# Altium PCB BSPD.PcbDoc
Units mil, origin at the board's own origin, x right, y up, seen from the top; angles counter-clockwise.
Board outline 2550 x 2415 mil, 2 copper layers (Top Layer, Bottom Layer); 48 components, 24 nets, 135 pads, 32 vias.
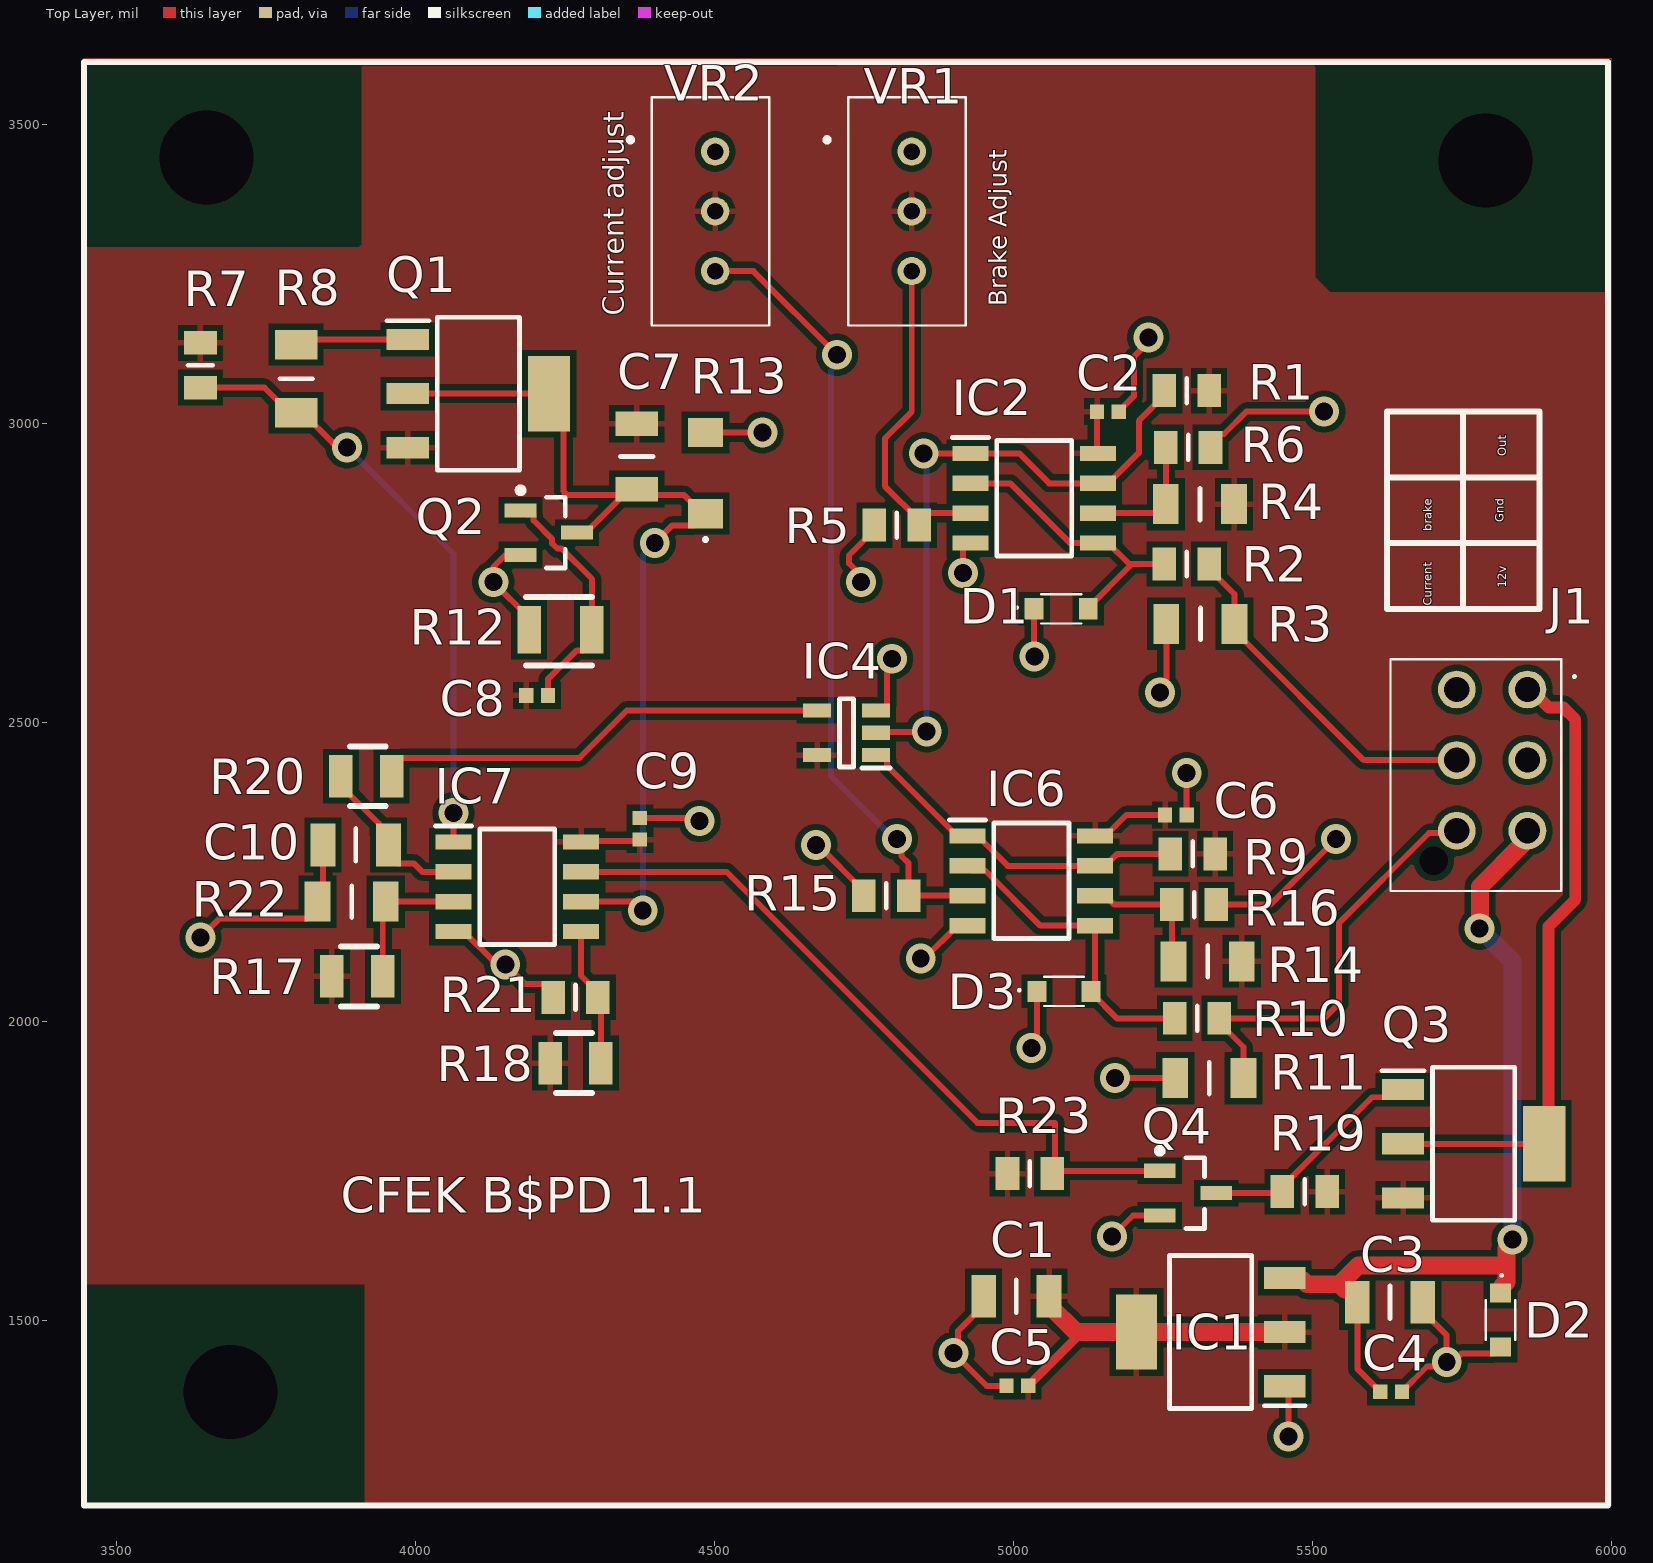
[diagram p0: Top Layer view]
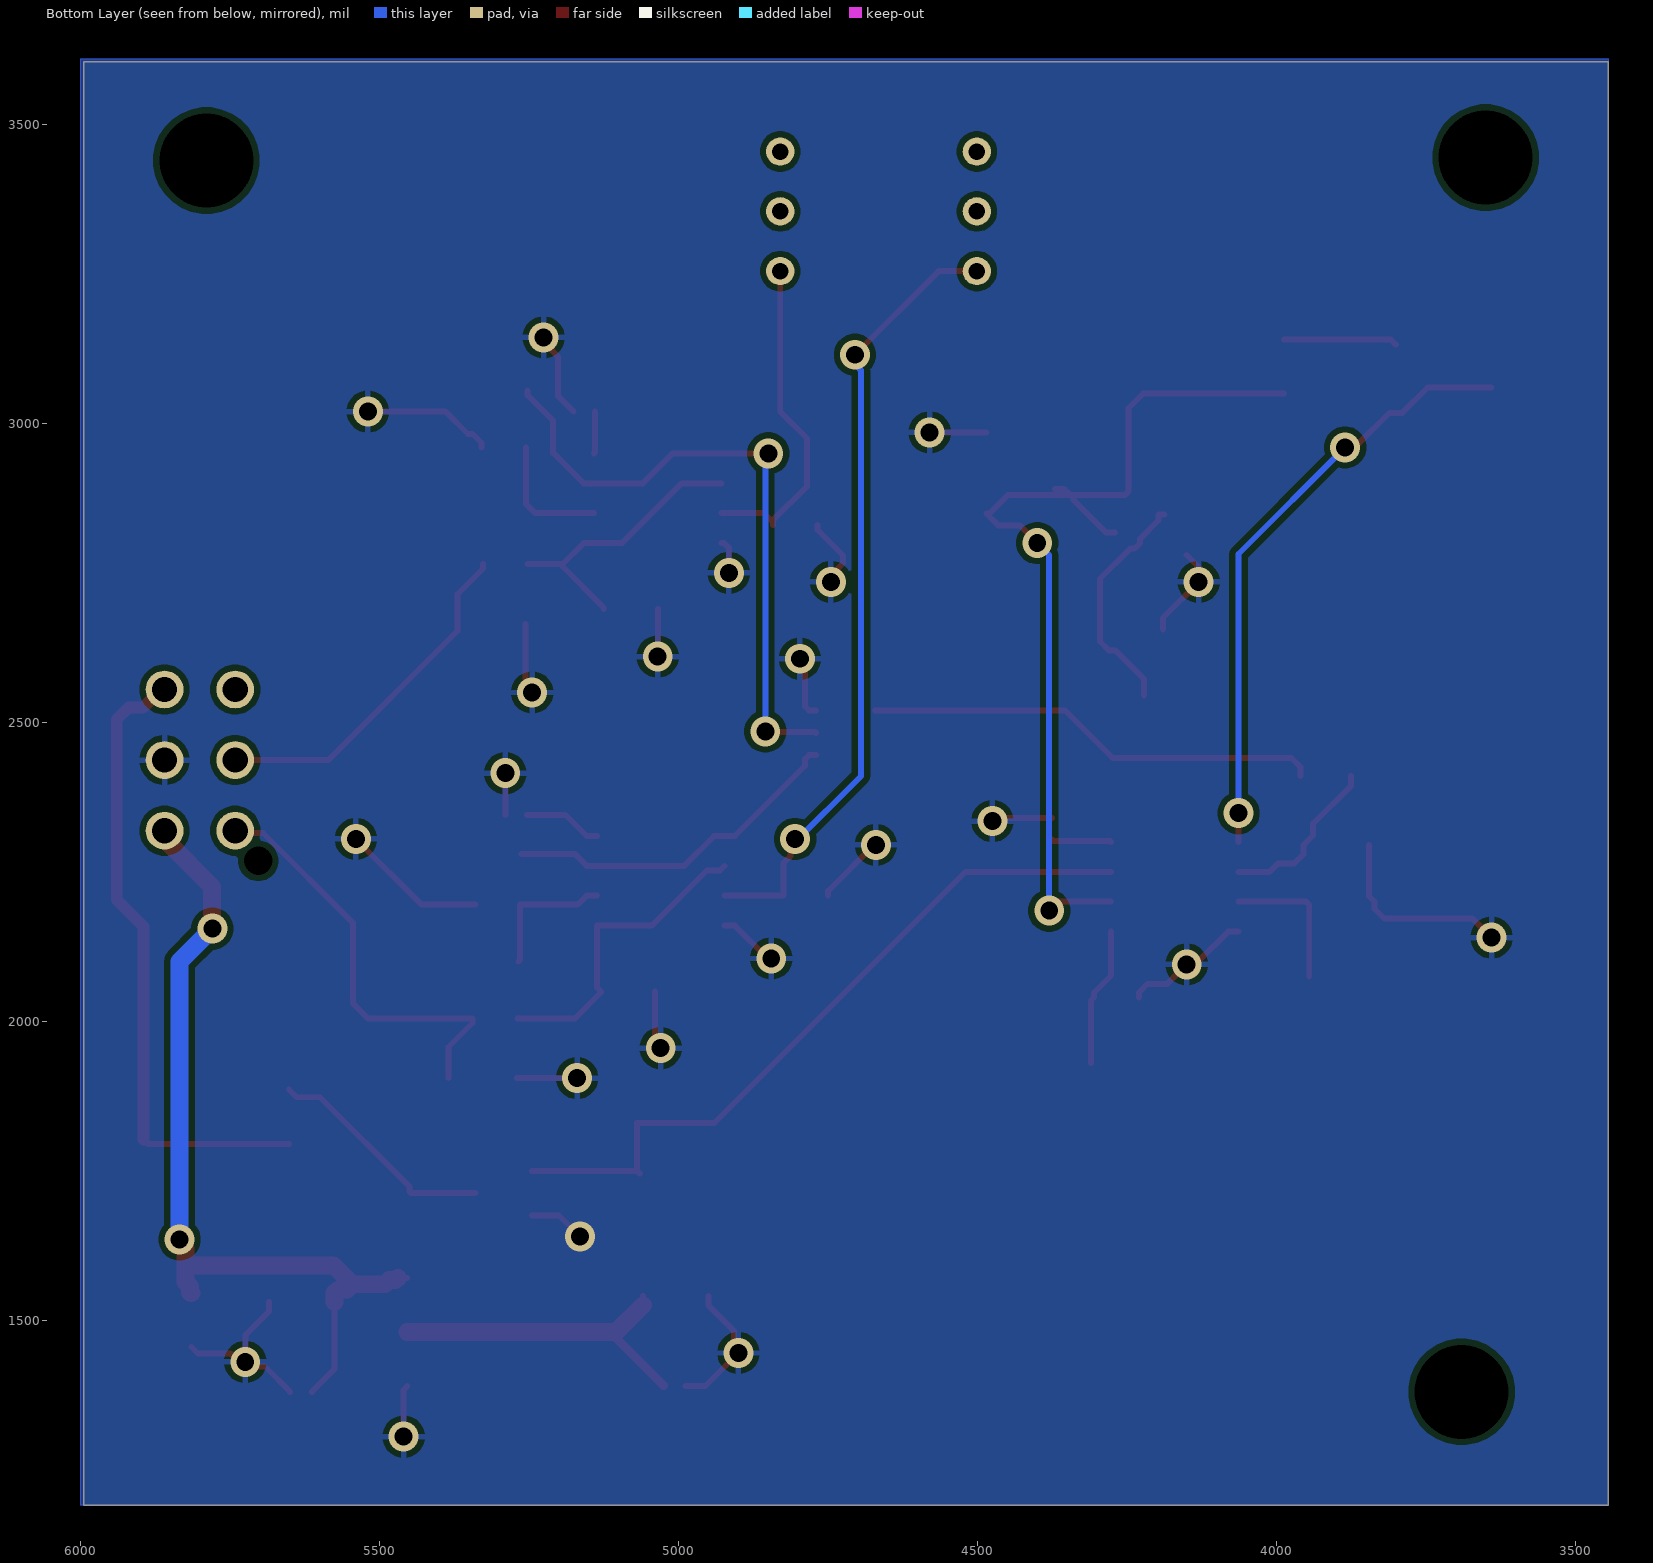
[diagram p1: Bottom Layer view, seen from below]
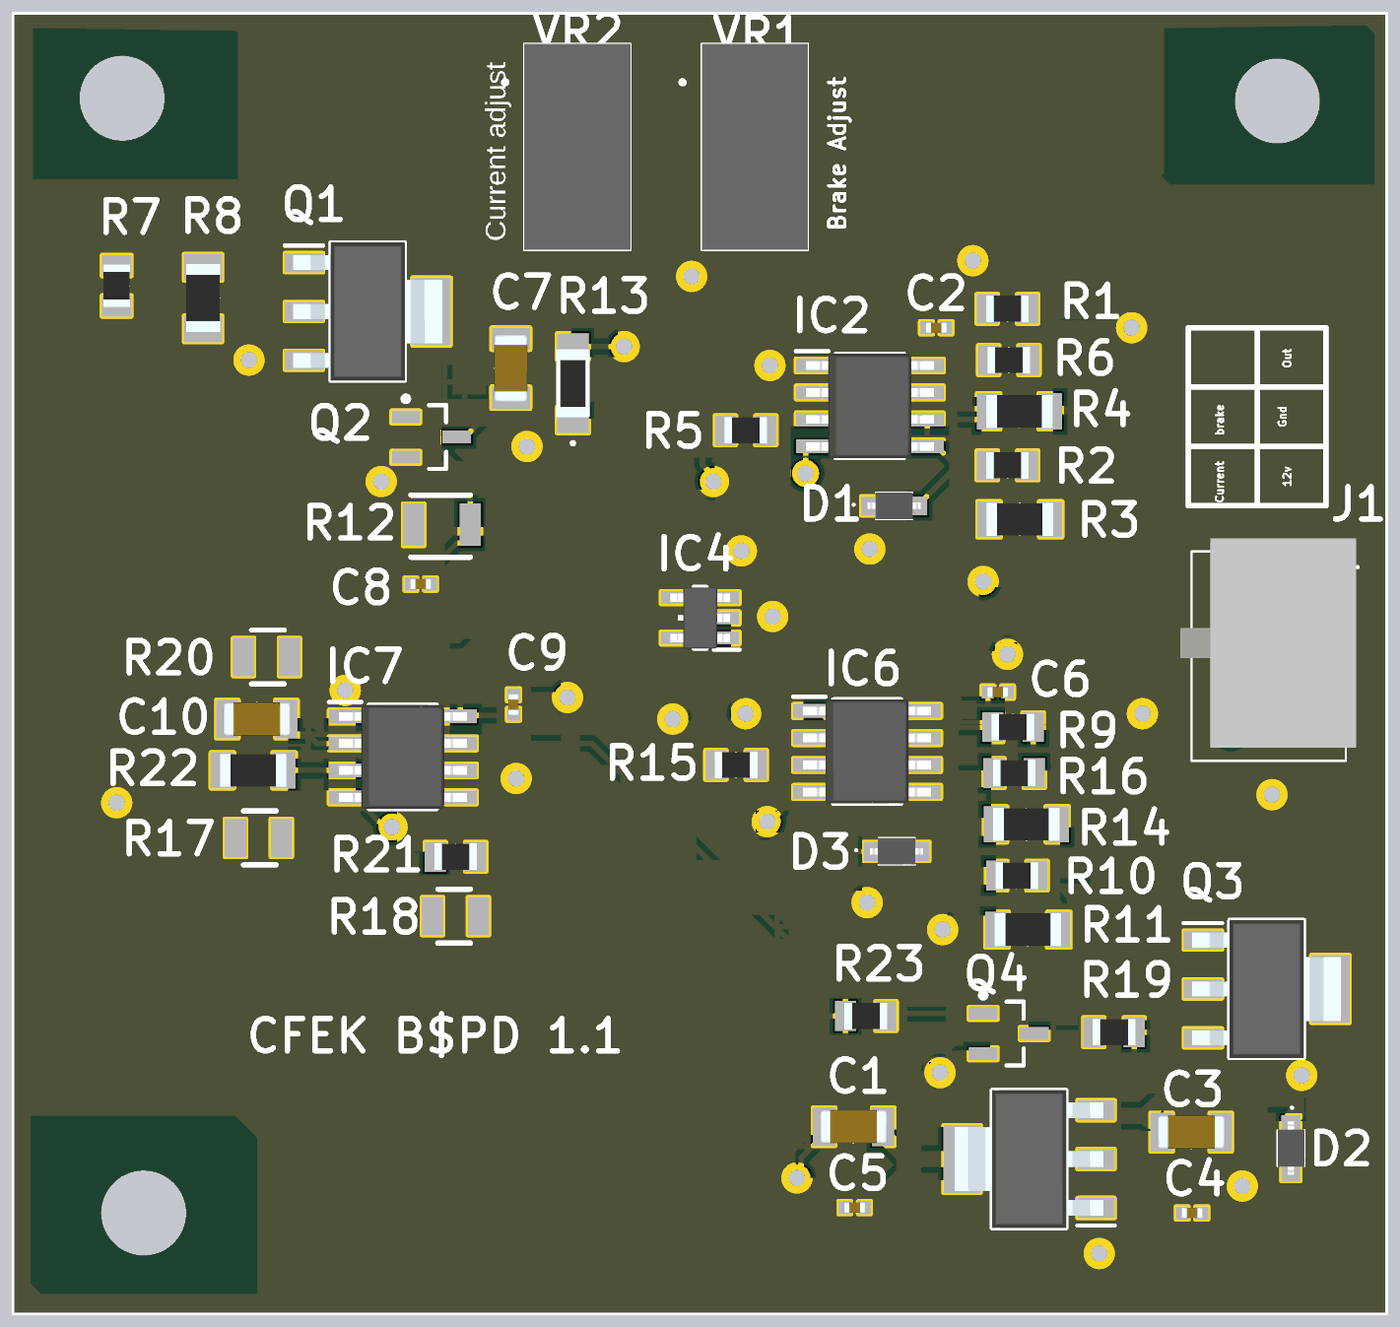
[diagram p2: 3D render of the assembled board from above, using the file's embedded part models]

## Layer stack, top to bottom
Top Solder: solder mask 0.4, Solder Resist, Dk 3.5
Top Layer: signal copper 1.4
Dielectric 1: dielectric 12.6, FR-4, Dk 4.8
Bottom Layer: signal copper 1.4
Bottom Solder: solder mask 0.4, Solder Resist, Dk 3.5

## Board outline
3445,1190 3445,3605 5995,3605 5995,1190

## Design rules (kind name [scope] priority, off if disabled: settings)
Clearance [All] p1: gap=10 ignorepadtopadclearanceinfootprint=FALSE except(0: Arc-Hole Track-Hole SMDPad-Hole THPad-Hole Via-Hole Fill-Hole Poly-Hole Region-Hole Text-Hole)
PolygonConnect [All] p1: connectstyle=Relief reliefconductorwidth=10 reliefentries=4 polygonreliefangle="90 Angle" airgapwidth=10
RoomDefinition bspd [InComponentClass('bspd')] p1: confinementstyle=ConfineIn formatcopy=TRUE lockcomponents=FALSE outline 6040,1255 7610,1255 7610,1645 6040,1645
RoutingVias [All] p1: holewidth=28 width=50 viastyle="Through Hole" minholewidth=28 minwidth=50 maxholewidth=28 maxwidth=50
SolderMaskExpansion [All] p1: expansion=4 istentingtop=FALSE
Width [All] p1: maxlimit=10 minlimit=5 preferedwidth=10 minimp=50.000000 maximp=50.000000 favimp=50.000000
30 further rules are at their usual default settings.

## Components (designator, comment, footprint, x,y, rotation, side; value= is the part's Value field where it differs from the comment)
C1 "CL31B106KAHNNNE" CAPC3216X180N 5005,1540 r180 top
C2 "GRM1555C1E103GE01D" CAPC1005X55N 5158.11,3020 r180 top
C3 "CL31B106KAHNNNE" CAPC3216X180N 5630.28,1530 r180 top
C4 "GRM1555C1E103GE01D" CAPC1005X55N 5631.89,1380 r180 top
C5 "GRM1555C1E103GE01D" CAPC1005X55N 5006.89,1390 r180 top
C6 "GRM1555C1E103GE01D" CAPC1005X55N 5271.89,2345 r180 top
C7 "CL31B106KAHNNNE" CAPC3216X180N 4370,2945 r90 top
C8 "GRM1555C1E103GE01D" CAPC1005X55N 4203.11,2545 r180 top
C9 "GRM1555C1E103GE01D" CAPC1005X55N 4375,2321.89 r90 top
C10 "CL31B106KAHNNNE" CAPC3216X180N 3899.72,2295 r0 top
D1 "DF2B36FU,H3F" 1SS357TPH3F 5080,2690 r270 top
D2 "DF2B36FU,H3F" 1SS357TPH3F 5815,1500.28 r180 top
D3 "DF2B36FU,H3F" 1SS357TPH3F 5084.72,2050 r270 top
IC1 "LM1117MPX-5.0_NOPB" SOT230P700X180-4N 5330,1480 r180 top
IC2 "LM393AD" SOIC127P600X175-8N 5035,2875 r0 top
IC4 "SN74AHC1G02DBVR" SOT95P280X145-5N 4720.79,2482.6 r180 top
IC6 "LM393AD" SOIC127P600X175-8N 5030,2235 r0 top
IC7 "LM393AD" SOIC127P600X175-8N 4170,2225 r0 top
J1 "206832-0601" 2068320601 5860,2555 r90 top
Q1 "DMP6023LE-13" SOT230P700X165-4N 4105,3050 r0 top
Q2 "2N7002" INF-PG-SOT23_M 4222.79,2817.4 r0 top
Q3 "DMP6023LE-13" SOT230P700X165-4N 5770,1795 r0 top
Q4 "2N7002" INF-PG-SOT23_M 5292.24,1712.45 r0 top
R1 "RNCP0805FTD10K0" RESC2012X65N 5290,3055 r0 top
R2 "RNCP0805FTD10K0" RESC2012X65N 5290,2765 r180 top
R3 "ERJ-8GEYJ104V" RESC3116X70N 5312.91,2665 r180 top
R4 "ERJ-8GEYJ104V" RESC3116X70N 5312.09,2865 r180 top
R5 "RNCP0805FTD10K0" RESC2012X65N 4805,2830 r180 top
R6 "RNCP0805FTD10K0" RESC2012X65N 5292.4,2960 r180 top
R7 "RNCP0805FTD10K0" RESC2012X65N 3640,3097.6 r90 top
R8 "RMCF1206FT100R" RESC3216X70N 3800,3075 r90 top
R9 "RNCP0805FTD10K0" RESC2012X65N 5300,2280 r0 top
R10 "RNCP0805FTD10K0" RESC2012X65N 5307.4,2005 r180 top
R11 "ERJ-8GEYJ104V" RESC3116X70N 5327.91,1905 r180 top
R12 "RMCF1206FT560K" RMCF1206FT560K 4210,2645 r180 top
R13 "ERA-8AEB105V" ERA8A_(0805) 4485,2917.09 r90 top
R14 "ERJ-8GEYJ104V" RESC3116X70N 5325,2100 r180 top
R15 "RNCP0805FTD10K0" RESC2012X65N 4787.4,2210 r180 top
R16 "RNCP0805FTD10K0" RESC2012X65N 5302.4,2195 r180 top
R17 "ERJ-8GEYJ393V" ERJ-8GEYJ393V 3830,1990 r0 top
R18 "ERJ-8GEYJ393V" ERJ-8GEYJ393V 4340,2015 r180 top
R19 "RNCP0805FTD10K0" RESC2012X65N 5487.4,1715 r0 top
R20 "ERJ-8GEYJ393V" ERJ-8GEYJ393V 3845,2325 r0 top
R21 "RNCP0805FTD10K0" RESC2012X65N 4267.6,2040 r0 top
R22 "ERJ-8GEYJ104V" RESC3116X70N 3892.91,2200 r180 top
R23 "RNCP0805FTD10K0" RESC2012X65N 5027.6,1745 r0 top
VR1 "M64X203KB40" M64X203KB40 4830,3455 r0 top
VR2 "M64X203KB40" M64X203KB40 4501.09,3455 r0 top

## Footprints (in the part's own frame and the unit in brackets; to place one, negate y for a bottom-side part, rotate by r counter-clockwise, add the part's x,y. Pads: shape width x height; smd on the part's side, far side on the other; paste and mask are expansions set on the pad)
1SS357TPH3F [mm]
  rect 0.9x0.8 smd: 1(0,-1.15) 2(0,1.15)
  silkscreen extent -0.63,-1.95 0.63,0.85, body extent -0.63,-1.25 0.63,1.25, height 0.9
2068320601 [mm]
  round 1.605 hole 1.07: 1(0,0) 2(-3,0) 3(-6,0) 4(0,3) 5(-3,3) 6(-6,3)
  round 0.6 hole 1.2 unplated: MH1(-7.28,3.98)
  silkscreen extent -8.56,-2.05 1.29,5.82, body extent -7.95,-1.92 1.9,6.34, height 9.8
CAPC1005X55N [mm]
  rect 0.6x0.62 smd: 1(-0.46,0) 2(0.46,0)
  body extent -0.5,-0.25 0.5,0.25, height 0.55
CAPC3216X180N [mm]
  rect 1.05x1.82 smd: 1(-1.39,0) 2(1.39,0)
  silkscreen extent 0,-0.7 0,0.7, body extent -1.6,-0.8 1.6,0.8, height 1.8
ERA8A_(0805) [mm]
  rect 1.25x1.5 smd: 1(-1.725,0) 2(1.725,0)
  silkscreen extent -2.87,-0.05 -2.78,0.05, body extent -1.6,-0.8 1.6,0.8, height 0.6
ERJ-8GEYJ393V [mil] "39k 1/4w smd resistor"
  rect 39.37x70.87 smd: 1(30,85) 2(115,85)
  silkscreen extent 45,35 105,135
INF-PG-SOT23_M [mm] "SOT23, 3-Leads, Body 2.9x1.3mm, Pitch 0.95mm, IPC Low Density"
  rect 1.35x0.6 smd: 1(-1.2,0.95) 2(-1.2,-0.95) 3(1.2,0)
  silkscreen extent -1.32,-1.5 0.7,1.92, body extent -0.7,-1.5 0.7,1.5, height 1.1
M64X203KB40 [mm]
  round 1.2 hole 0.7: A1(0,0) B1(0,-2.54) C1(0,-5.08)
  silkscreen extent -3.7,-7.39 2.3,2.31, body extent -2.7,-7.39 2.3,2.31, height 9.9
RESC2012X65N [mm]
  rect 1x1.4 smd: 1(-0.95,0) 2(0.95,0)
  silkscreen extent 0,-0.53 0,0.53, body extent -1,-0.63 1,0.63, height 0.65
RESC3116X70N [mm]
  rect 1.1x1.7 smd: 1(-1.45,0) 2(1.45,0)
  silkscreen extent 0,-0.67 0,0.67, body extent -1.56,-0.77 1.56,0.77, height 0.7
RESC3216X70N [mm]
  rect 1.25x1.8 smd: 1(-1.45,0) 2(1.45,0)
  silkscreen extent 0,-0.7 0,0.7, body extent -1.6,-0.8 1.6,0.8, height 0.7
RMCF1206FT560K [mil]
  rect 39.37x78.74 smd: 1(-85,-10) 2(20,-10)
  silkscreen extent -85,-65 25,50
SOIC127P600X175-8N [mm]
  rect 1.528x0.65 smd: 1(-2.711,1.905) 2(-2.711,0.635) 3(-2.711,-0.635) 4(-2.711,-1.905) 5(2.711,-1.905) 6(2.711,-0.635) 7(2.711,0.635) 8(2.711,1.905)
  silkscreen extent -3.47,-2.45 1.6,2.58, body extent -3.01,-2.45 3.01,2.45, height 1.63
SOT95P280X145-5N [mm]
  rect 1.2x0.6 smd: 1(-1.25,0.95) 2(-1.25,0) 3(-1.25,-0.95) 4(1.25,-0.95) 5(1.25,0.95)
  silkscreen extent -1.85,-1.45 0.3,1.5, body extent -1.4,-1.45 1.4,1.45, height 1.2
SOT230P700X165-4N [mm]
  rect 1.8x0.9 smd: 1(-3,2.3) 2(-3,0) 3(-3,-2.3)
  rect 1.8x3.2 smd: 4(3,0)
  silkscreen extent -3.9,-3.25 1.75,3.25, body extent -3.5,-3.25 3.5,3.25, height 1.65
SOT230P700X180-4N [mm]
  rect 1.75x0.95 smd: 1(-3.15,2.3) 2(-3.15,0) 3(-3.15,-2.3)
  rect 1.75x3.2 smd: 4(3.15,0)
  silkscreen extent -4.03,-3.25 1.75,3.25, body extent -3.5,-3.25 3.5,3.25, height 1.8

## Part data
C1 C3 C7 C10: "Capacitor", Manufacturer_Name="Samsung Electro-Mechanics", Mouser Part Number=187-CL31B106KAHNNNE, Arrow Part Number=CL31B106KAHNNNE, Arrow Price/Stock=https://www.arrow.com/en/products/cl31b106kahnnne/samsung-electro-mechanics?region=europe, Datasheet Link=https://datasheet.datasheetarchive.com/originals/distributors/Datasheets_SAMA/d94547340e0e9d2be5f415b64e4e2f0a.pdf, Height=1.8mm, Manufacturer_Part_Number=CL31B106KAHNNNE, Mouser Price/Stock=https://www.mouser.co.uk/ProductDetail/Samsung-Electro-Mechanics/CL31B106KAHNNNE?qs=349EhDEZ59r5EZhnLOTsYA%3D%3D
C2 C4 C5 C6 C8 C9: "Capacitor", Manufacturer_Name="Murata Electronics", Mouser Part Number=81-GRM1555C1E103GE1D, Datasheet Link=http://www.murata.com/~/media/webrenewal/support/library/catalog/products/capacitor/mlcc/c02e.pdf, Height=0.55mm, Manufacturer_Part_Number=GRM1555C1E103GE01D, Mouser Price/Stock=https://www.mouser.co.uk/ProductDetail/Murata-Electronics/GRM1555C1E103GE01D?qs=d0WKAl%252BL4KYoPP5%252BcWf4LA%3D%3D
D1 D2 D3: "TVS Diode (Bi-directional)", Manufacturer_Name=Toshiba, Mouser Part Number=757-DF2B36FUH3F, Arrow Part Number=DF2B36FU,H3F, Arrow Price/Stock=https://www.arrow.com/en/products/df2b36fuh3f/toshiba?region=nac, Datasheet Link=http://toshiba.semicon-storage.com/info/docget.jsp?did=36248&prodName=DF2B36FU, Height=1mm, Manufacturer_Part_Number=DF2B36FU,H3F, Mouser Price/Stock=https://www.mouser.co.uk/ProductDetail/Toshiba/DF2B36FUH3F?qs=PDgMCp4xDJY7HvoH3U6rfA%3D%3D
IC1: "Integrated Circuit", Arrow Part Number=LM1117MPX-5.0/NOPB, Manufacturer_Name="Texas Instruments", Mouser Part Number=926-LM1117MPX5.0NOPB, Arrow Price/Stock=https://www.arrow.com/en/products/lm1117mpx-5.0nopb/texas-instruments?region=nac, Datasheet Link=http://www.ti.com/lit/gpn/lm1117, Height=1.8mm, Manufacturer_Part_Number=LM1117MPX-5.0/NOPB, Mouser Price/Stock=https://www.mouser.co.uk/ProductDetail/Texas-Instruments/LM1117MPX-5.0-NOPB?qs=X1J7HmVL2ZE1O12Qsl7F9g%3D%3D
IC2 IC6 IC7: "Integrated Circuit", Manufacturer_Name="Texas Instruments", Mouser Part Number=595-LM393AD, Arrow Part Number=LM393AD, Arrow Price/Stock=https://www.arrow.com/en/products/lm393ad/texas-instruments?region=nac, Datasheet Link=http://www.ti.com/lit/ds/symlink/lm393a.pdf, Height=1.75mm, Manufacturer_Part_Number=LM393AD, Mouser Price/Stock=https://www.mouser.co.uk/ProductDetail/Texas-Instruments/LM393AD?qs=LfG3tU9ud8Dw2sg2xFhQ4Q%3D%3D
IC4: "Integrated Circuit", Manufacturer_Name="Texas Instruments", Mouser Part Number=595-SN74AHC1G02DBVR, Arrow Part Number=SN74AHC1G02DBVR, Arrow Price/Stock=https://www.arrow.com/en/products/sn74ahc1g02dbvr/texas-instruments, Datasheet Link=http://www.ti.com/lit/gpn/sn74ahc1g02, Height=1.45mm, Manufacturer_Part_Number=SN74AHC1G02DBVR, Mouser Price/Stock=https://www.mouser.co.uk/ProductDetail/Texas-Instruments/SN74AHC1G02DBVR?qs=VuX40u8tcuDWJaATLLYZCQ%3D%3D
J1: "Connector", Manufacturer_Name=Molex, Mouser Part Number=538-206832-0601, Datasheet Link=https://componentsearchengine.com/Datasheets/1/206832-0601.pdf, Height=10.99mm, Manufacturer_Part_Number=206832-0601, Mouser Price/Stock=https://www.mouser.co.uk/ProductDetail/Molex/206832-0601?qs=EBDBlbfErPyv6tUvq0oX3w%3D%3D
Q1 Q3: "MOSFET (P-Channel)", Manufacturer_Name="Diodes Inc.", Mouser Part Number=621-DMP6023LE-13, Arrow Part Number=DMP6023LE-13, Arrow Price/Stock=https://www.arrow.com/en/products/dmp6023le-13/diodes-incorporated?region=nac, Datasheet Link=https://www.diodes.com/assets/Datasheets/DMP6023LE.pdf, Height=1.65mm, Manufacturer_Part_Number=DMP6023LE-13, Mouser Price/Stock=https://www.mouser.co.uk/ProductDetail/Diodes-Incorporated/DMP6023LE-13?qs=jXf%2FRVhl83aBpRq%2FTUDEyw%3D%3D
Q2 Q4: library part CMP-1149-00026-1, "N-Channel OptiMOS Small-Signal-Transistor, 60 V VDS, 0.3 A ID, -55 to 150 degC, PG-SOT23, Reel, Green", Manufacturer=Infineon, ComponentLink1Description="Manufacturer URL", ComponentLink1URL=http://www.infineon.com/, ComponentLink2Description=Datasheet, ComponentLink2URL=http://www.infineon.com/dgdl/2N7002_Rev2.4.pdf?folderId=db3a3043156fd573011622e10b5c1f67&fileId=db3a304319bc939a0119c2a9461e79e6, ComponentLink3Description="Package Specification", ComponentLink3URL=http://www.infineon.com/dgdl/SOT23-Package_Overview.pdf?folderId=db3a30431936bc4b0119532290053c66&fileId=db3a30431936bc4b0119533468123c85, DatasheetVersion="Rev. 2.4", Green=TRUE, Halogen-free=TRUE, ID (max)="0.3Â A", IDpuls (max)="1.2Â A", Mounting Technology="Surface Mount", PackageDescription="3-Pin Small Outline Transistor Package, 2.9 x 1.3 mm Body, 0.95 mm Pitch", PackageReference=PG-SOT23, PackageVersion=Apr-08, Packing=Reel, PartNumber=2N7002, Ptot (max)="0.5Â W", QG="0.4Â nC", RDS (on) (max)="3,000 mOhm", RDS (on) (max) (@4.5V)="4,000 mOhm", RthJA (max)="250 K/W", VDS (max)="60 V", VGS(th) (max)="2.5Â V", VGS(th) (min)="1.5Â V"
R1 R2 R5 R6 R7 R8 R9 R10 R15 R16 R19 R21 R23: "Resistor", Manufacturer_Name="Stackpole Electronics"
  R1 R2 R5 R6 R7 R9 R10 R15 R16 R19 R21 R23: Arrow Part Number=RNCP0805FTD10K0, Arrow Price/Stock=https://www.arrow.com/en/products/rncp0805ftd10k0/stackpole-electronics?region=nac, Datasheet Link=https://cs.seielect.com/catalog/SEI-RNCP.pdf, Height=0.65mm, Manufacturer_Part_Number=RNCP0805FTD10K0
  R8: Arrow Part Number=RMCF1206FT100R, Arrow Price/Stock=https://www.arrow.com/en/products/rmcf1206ft100r/stackpole-electronics, Datasheet Link=https://cs.seielect.com/catalog/SEI-RMCF_RMCP.pdf, Height=0.7mm, Manufacturer_Part_Number=RMCF1206FT100R
R3 R4 R11 R14 R22: "Resistor", Manufacturer_Name=Panasonic, Mouser Part Number=667-ERJ-8GEYJ104V, Arrow Part Number=ERJ-8GEYJ104V, Arrow Price/Stock=https://www.arrow.com/en/products/erj-8geyj104v/panasonic?region=nac, Datasheet Link=http://industrial.panasonic.com/www-cgi/jvcr13pz.cgi?E+PZ+3+AOA0001+ERJ8GEYJ104V+7+WW, Height=0.7mm, Manufacturer_Part_Number=ERJ-8GEYJ104V, Mouser Price/Stock=https://www.mouser.co.uk/ProductDetail/Panasonic/ERJ-8GEYJ104V?qs=1VWA5LkbEaq%252BpFGvVNqM0w%3D%3D
R12: "560k smd 1/4 w resistor"
R13: "Resistor", Manufacturer_Name=Panasonic, Mouser Part Number=667-ERA-8AEB105V, Datasheet Link=http://industrial.panasonic.com/cdbs/www-data/pdf/RDM0000/AOA0000C307.pdf, Height=0.7mm, Manufacturer_Part_Number=ERA-8AEB105V, Mouser Price/Stock=https://www.mouser.com/Search/Refine.aspx?Keyword=667-ERA-8AEB105V
VR1 VR2: "Variable Resistor", Manufacturer_Name=Vishay, Mouser Part Number=594-64X203, Arrow Part Number=M64X203KB40, Arrow Price/Stock=https://www.arrow.com/en/products/m64x203kb40/vishay, Datasheet Link=https://componentsearchengine.com/Datasheets/1/M64X203KB40.pdf, Height=9.8mm, Manufacturer_Part_Number=M64X203KB40, Mouser Price/Stock=https://www.mouser.co.uk/ProductDetail/Vishay-Spectrol/M64X203KB40?qs=iBCKGqwqm%252Bj9keWMEvhABw%3D%3D

## Free pads (board coordinates)
  round 80 hole 157.48 unplated: 2(3650,3445) 2(3690,1380) 2(5790,3440)

## Via types
v1: diameter 50, hole 30, Top Layer to Bottom Layer, 32 vias

## Nets (pads, with @x,y where several pads share a name; then routed paths per layer and width w, separated by ;. In a path a pad name is that pad's centre, name@x,y a point inside that pad or via, vN(x,y) a via of type N, cw(c..) or ccw(c..) an arc to the next point about the centre after c; other vN are vias at no path point)
1out: IC7.1 R7.1 R8.1 | length 1020.3
  Top Layer w10: R7.1 3746.89,3060.2 3789.17,3017.91 R8.1 3810.83,3017.91 3861.09,2967.65 3877.35,2967.65 v1(3885,2960) ; IC7.1 v1(4063.27,2348.27)
  Bottom Layer w10: v1(3885,2960) 4063.27,2781.73 v1(4063.27,2348.27)
2in-: C7.1 IC7.6 Q1.2 Q1.4 Q2.3 R13.1 | length 1632.9
  Top Layer w10: Q1.2 Q1.4 4247.24,3025.87 4247.24,2886.41 4253.09,2880.55 C7.1@4345.12,2880.55 ; Q2.3 4284.79,2817.4 4339.17,2871.78 4339.17,2874.61 C7.1@4345.12,2880.55 ; IC7.6 4365,2200 v1(4380,2185) ; C7.1 4354.84,2890.28 C7.1@4345.12,2880.55 ; v1(4400,2800) 4429.57,2829.57 4465.39,2829.57 R13.1 4480.08,2849.17 4448.7,2880.55 C7.1@4345.12,2880.55
  Bottom Layer w10: v1(4380,2185) 4380,2780 v1(4400,2800)
+5: C1.1 C2.2 C5.1 C6.2 C7.2 C8.2 C9.1 IC1.2 IC1.4 IC2.8 IC4.5 IC6.8 IC7.8 Q1.3 Q3.3 R1.2 R4.1 R7.2 R9.2 R14.1 R17.1 R18.2 R19.2 R23.1 VR1.B1 VR2.B1 | length 853.1
  Top Layer w10: IC7.8 4278.62,2301.89 4373.11,2301.89 C9.1 ; C5.1 C5.1@5025,1390.39 ; C1.1@5059.72,1524.84 C1.1 ; 5104.57,1469.96 5104.57,1480 ; IC6.8 5154.02,2310 5189.02,2345 C6.2 ; C2.2 5140,2951.73 IC2.8
  Top Layer w15: C5.1@5025,1390.39 5104.57,1469.96
  Top Layer w30: C1.1@5059.72,1524.84 5104.57,1480 IC1.4 IC1.2
+12: C3.2 C4.2 D2.1 IC1.3 J1.3 | length 1447.4
  Top Layer w10: IC1.3 IC1.3@5469.76,1570.55 ; C3.2 5575.55,1418.62 5613.78,1380.39 C4.2 ; J1.3@5860,2304.39 J1.3
  Top Layer w30: IC1.3@5469.76,1570.55 5473.46,1566.85 5484.19,1566.85 5491.04,1560 5545.55,1560 ; C3.2 5575.55,1545.16 5569.88,1550.83 5554.72,1550.83 5545.55,1560 ; v1(5780,2155) 5780.61,2155.61 5780.61,2225 5853.65,2298.04 5853.65,2303.45 5854.59,2304.39 J1.3@5860,2304.39 ; D2.1 5816.97,1545.55 5817.72,1546.3 5817.72,1556.59 5825,1563.87 5825,1591.73 ; v1(5835,1635) 5835,1629.59 5825,1619.59 5825,1591.73 ; 5545.55,1560 5577.28,1591.73 5825,1591.73
  Bottom Layer w30: v1(5780,2155) 5835,2100 v1(5835,1635)
Brake_Transducer: J1.5 R2.1 R3.1 | length 590.9
  Top Layer w10: R2.1 5327.4,2757.13 5370,2714.53 R3.1 5370,2653.19 5586.3,2436.89 J1.5
BSPD_Out: J1.1 Q3.2 Q3.4 | length 1068.4
  Top Layer w10: Q3.2 Q3.4 Q3.4@5895,1801.89 ; J1.1 J1.1@5865.72,2555
  Top Layer w20: J1.1@5865.72,2555 5895.81,2524.91 5920.09,2524.91 5940,2505 5940,2203.43 5895,2158.43 5895,1885.87 Q3.4@5895,1801.89
comparitor1: IC4.1 IC6.1 IC6.7 R9.1 | length 584.1
  Top Layer w10: IC4.1 4781.81,2445.2 4788.62,2438.39 4788.62,2427.36 4905.98,2310 IC6.1 4940.55,2310 4990.55,2260 IC6.7 5154.02,2260 5174.02,2280 R9.1
comparitor2: IC2.1 IC2.7 IC4.2 R1.1 | length 1086.6
  Top Layer w10: IC4.2 4771.2,2483.8 4853.8,2483.8 v1(4855,2485) ; v1(4850,2950) IC2.1 5010,2950 5060,2900 IC2.7 5159.02,2900 5210,2950.98 5210,3004.53 5252.6,3047.13 R1.1
  Bottom Layer w10: v1(4850,2950) 4855,2945 v1(4855,2485) v1@4855,2475
Currentsensorin: J1.6 R10.1 R11.1 | length 722.6
  Top Layer w10: R11.1 5385,1956.93 5344.8,1997.13 R10.1 5520,2005 5545,2030 5545,2164.7 5695.3,2314.99 5738.1,2314.99 J1.6
GND: C1.2 C2.1 C3.1 C4.1 C5.2 C6.1 C9.2 C10.1 D1.1 D2.2 D3.1 IC1.1 IC2.4 IC4.3 IC6.4 IC7.4 J1.2 Q2.2 Q4.2 R3.2 R5.2 R6.1 R11.2 R12.2 R13.2 R15.2 R16.1 R21.1 R22.2 | length 3187.5
  Top Layer w10: v1(3640,2140) 3671.54,2171.54 3819.17,2171.54 3835.83,2188.19 R22.2 3845,2209.17 C10.1 ; IC7.4 4080.55,2150 4127.9,2102.65 4142.35,2102.65 v1(4150,2095) 4182.44,2062.56 4215.51,2062.56 4230.2,2047.87 R21.1 ; Q2.2@4150,2780 4130,2760 v1(4130,2735) 4130,2734.68 4190,2674.68 R12.2 ; C9.2 4470,2340 v1(4475,2335) ; R13.2 v1(4580,2985) ; v1(4670,2295) 4672.87,2295 4750,2217.87 R15.2 ; v1(4745.29,2735) 4745.29,2745.82 4725,2766.12 4725,2779.53 4767.6,2822.13 R5.2 ; IC4.3 4781.81,2520 4788.62,2526.81 4788.62,2587.3 4796.99,2595.67 v1(4796.99,2606.49) ; v1(4845,2105) 4850.98,2105 4905.98,2160 IC6.4 ; v1(4915.98,2750) 4915.98,2792.2 4923.78,2800 IC2.4 ; C1.2 4950.28,1524.84 4907.65,1482.22 4907.65,1452.65 v1(4900,1445) 4955,1390 C5.2 ; v1(5030,1955) 5039.45,1964.45 D3.1 ; D1.1 5034.72,2610.28 v1(5035,2610) ; v1(5165,1640) 5200.05,1675.05 Q4.2 ; v1(5170,1905) R11.2 ; C2.1 5176.22,3020.39 5201.52,3045.69 5201.52,3111.52 v1@5220,3130 ; v1(5245,2550) 5255.83,2560.83 R3.2 ; C6.1 v1(5290,2415) ; R6.1 5329.8,2967.87 5344.49,2982.56 5352.36,2982.56 5389.8,3020 v1(5520,3020) ; R16.1 5430,2195 v1(5540,2305) ; IC1.1 5460,1383.46 v1(5460,1305) ; C4.1 5650,1380.39 5691.95,1422.35 5717.35,1422.35 v1(5725,1430) ; C3.1 5685,1514.84 5725,1474.84 v1(5725,1430) ; D2.2 5804.25,1444.25 5750.08,1444.25 5735.82,1430 v1(5725,1430)
  other v1: 5225.85,3144.13
NetC8_1: C8.1 Q2.1 R12.1 | length 394.9
  Top Layer w10: Q2.1@4186.85,2848.15 4196.95,2848.15 4197.12,2847.99 4197.12,2837.88 4228.45,2806.55 4228.45,2799.38 4237.24,2790.59 4244.41,2790.59 4295,2740 R12.1 4295,2635.32 4280.31,2620.63 4269.65,2620.63 4221.22,2572.2 C8.1
NetC10_2: C10.2 IC7.2 R20.1 | length 284.2
  Top Layer w10: R20.1 3875,2394.25 3938.78,2330.47 3938.78,2310.67 C10.2 3954.45,2279.84 3970.12,2264.17 3997.07,2264.17 4011.24,2250 IC7.2
NetD1_2: D1.2 IC2.2 IC2.5 R2.2 | length 483.7
  Top Layer w10: IC2.2 4995,2900 5095,2800 IC2.5 5159.02,2800 5194.02,2765 ; D1.2 5125.28,2691.97 5194.02,2760.71 5194.02,2765 ; R2.2 5194.02,2765
NetD3_2: D3.2 IC6.2 IC6.5 R10.2 | length 527.5
  Top Layer w10: IC6.2 4931.06,2252.2 4952.8,2252.2 5045,2160 IC6.5 5136.73,2056.73 D3.2 5130,2048.03 5173.03,2005 R10.2
NetIC2_3: IC2.3 R5.1 VR1.C1 | length 559.4
  Top Layer w10: VR1.C1 4830,3020 4785,2975 4785,2895.28 4842.4,2837.87 R5.1@4842.4,2835.31 ; R5.1 R5.1@4842.4,2835.31 ; IC2.3 4857.09,2850 R5.1@4842.4,2835.31
NetIC2_6: IC2.6 R4.2 R6.2 | length 214.5
  Top Layer w10: IC2.6 5240,2850 R4.2 R6.2
NetIC6_3: IC6.3 R15.1 VR2.C1 | length 1335.3
  Top Layer w10: VR2.C1 4565,3255 v1(4705,3115) ; v1(4805,2305) 4812.65,2297.35 4812.65,2276.55 4824.8,2264.4 R15.1 IC6.3
  Bottom Layer w10: v1(4705,3115) 4697.35,3107.35 4697.35,3091.49 4695,3089.14 4695,2410 v1@4810,2295
NetIC6_6: IC6.6 R14.2 R16.2 | length 230.7
  Top Layer w10: IC6.6 5154.02,2210 5169.02,2195 R16.2 5265,2102.91 R14.2
NetIC7_3: IC7.3 R17.2 R22.1 | length 240.3
  Top Layer w10: R17.2 3945,2195 R22.1 IC7.3
NetIC7_5: IC7.5 R18.1 R21.2 | length 233.8
  Top Layer w10: IC7.5 4276.73,2076.14 4305,2047.87 R21.2 4310,2035 R18.1
NetIC7_7: IC7.7 Q4.1 R23.2 | length 1229.5
  Top Layer w10: IC7.7 4520,2250 4940,1830 5070,1830 5070,1750 R23.2@5069.85,1749.85 ; R23.2 R23.2@5069.85,1749.85 ; Q4.1 R23.2@5069.85,1749.85
NetQ1_1: Q1.1 R8.2 | length 190.4
  Top Layer w10: R8.2 3808.46,3140.55 Q1.1
NetQ3_1: Q3.1 Q4.3 R19.1 | length 388.7
  Top Layer w10: Q4.3 5447.45,1712.45 R19.1 5450,1722.87 5599.96,1872.83 5639.17,1872.83 Q3.1
"NOR out": IC4.4 R20.2 | length 766.4
  Top Layer w10: R20.2 3960,2425.75 3974.69,2440.43 4274.04,2440.43 4353.6,2520 IC4.4
pads on no net: J1.4 J1.MH1 VR1.A1 VR2.A1

## Polygon pours and split planes (outlines as drawn)
GND on Bottom Layer "NONET_L-01_P-001" (solid, pour order 3): 3445,3610 3445,1190 6000,1190 6000,3610
GND on Bottom Layer "NONET_L-01_P-001" (solid, shelved, pour order 0): 3445,3610 3445,1190 6000,1190 6000,3610
+5 on Top Layer "NONET_L-01_P-001" (solid, pour order 2): 3447.5,3597.5 3447.5,1192.5 3445,1190 6000,1190 6000,3590 5990,3600
+5 on Top Layer "NONET_L01_P001" (solid, shelved, pour order 1): 3445,3610 3445,1190 6000,1190 6000,3610

## Other copper
Top Layer:
  pour cut-out: 3440,1555 3445,1560 3915,1560 3915,1195 3910,1190 3445,1190
  pour cut-out: 5505,3605 5505,3245 5530,3220 5995,3220 5995,3605
  pour cut-out: 3450,3600 3445,3595 3445,3295 3905,3295 3910,3300 3910,3605
  pour cut-out: 3450,3600 3445,3595 3445,3350

## Silkscreen, mask and mechanical layers (free items; w line width, h text height)
Top Overlay:
  lines w10: 5625,2800 5880,2800 ; 5625,2910 5880,2910 ; 5752.5,2690 5752.5,3020 ; 3445,1190 5995,1190 5995,3605 3445,3605 3445,1190 ; 5625,2690 5880,2690 5880,3020 5625,3020 5625,2690
  text "Brake Adjust" at 4989,3196 h30 r90
  text "Current adjust" at 4360,3180 h60 r90
  text "Out" at 5825,2945 h14 r90
  text "Gnd" at 5820,2835 h14 r90
  text "brake" at 5700,2820 h14 r90
  text "12v" at 5825,2725 h14 r90
  text "Current" at 5700,2695 h14 r90
  text "CFEK B$PD 1.1" at 3875,1680 h60